# Allegro board SMA_Prototype_C.brd
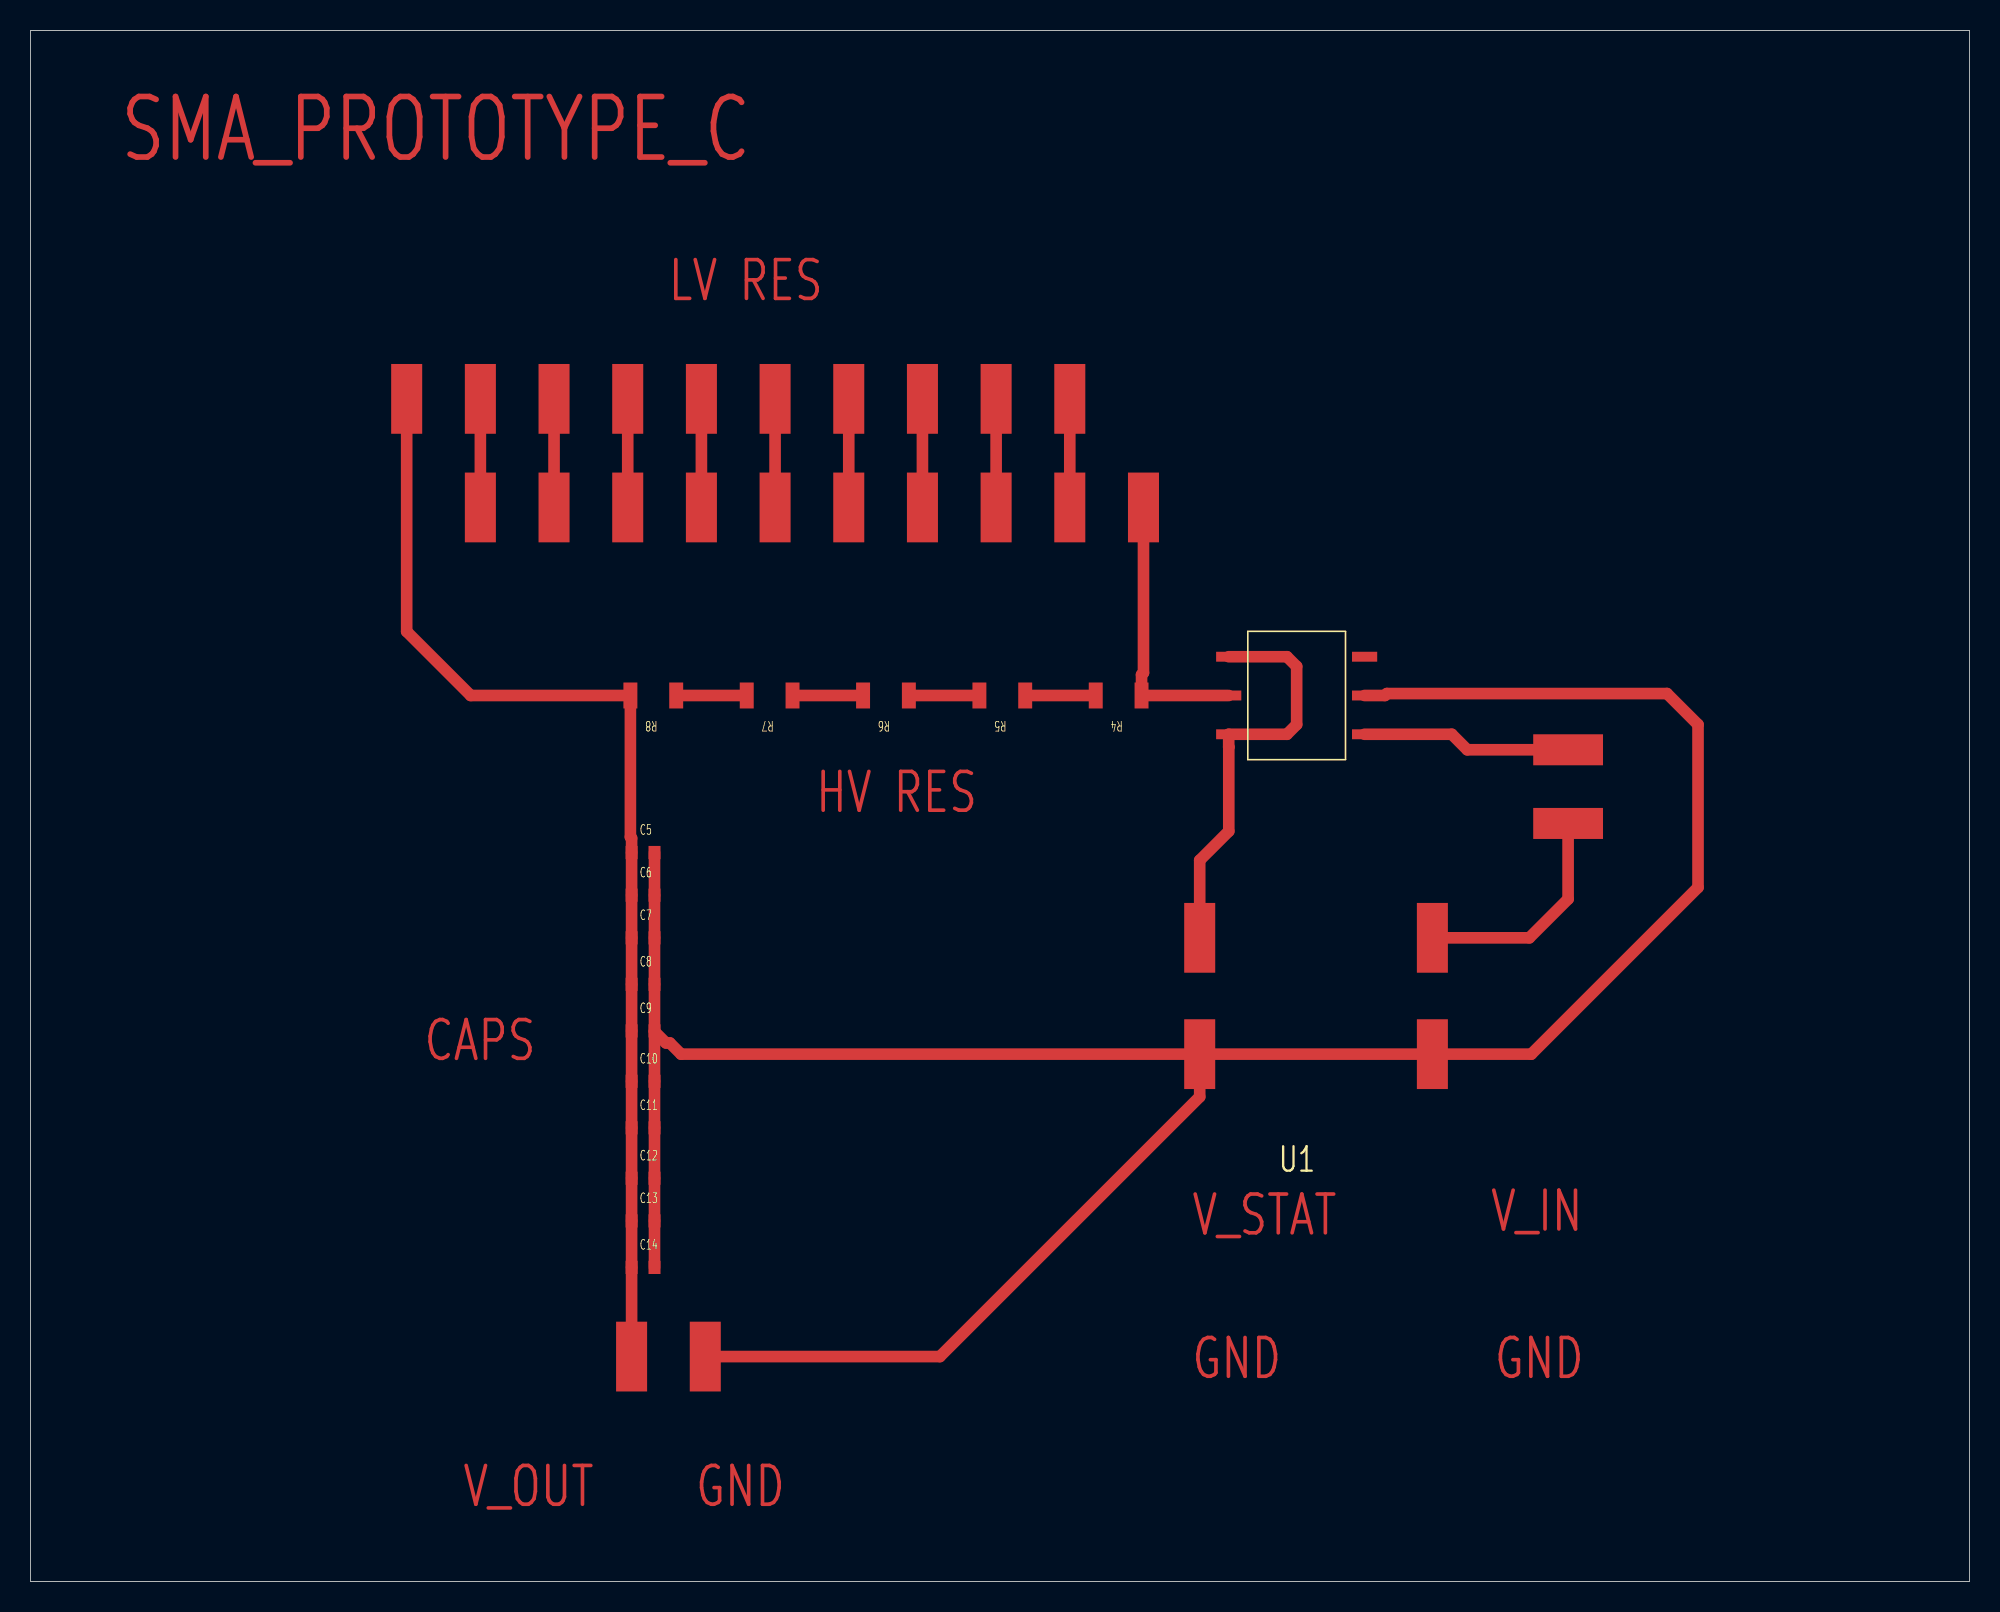
[diagram p0: board, top side]
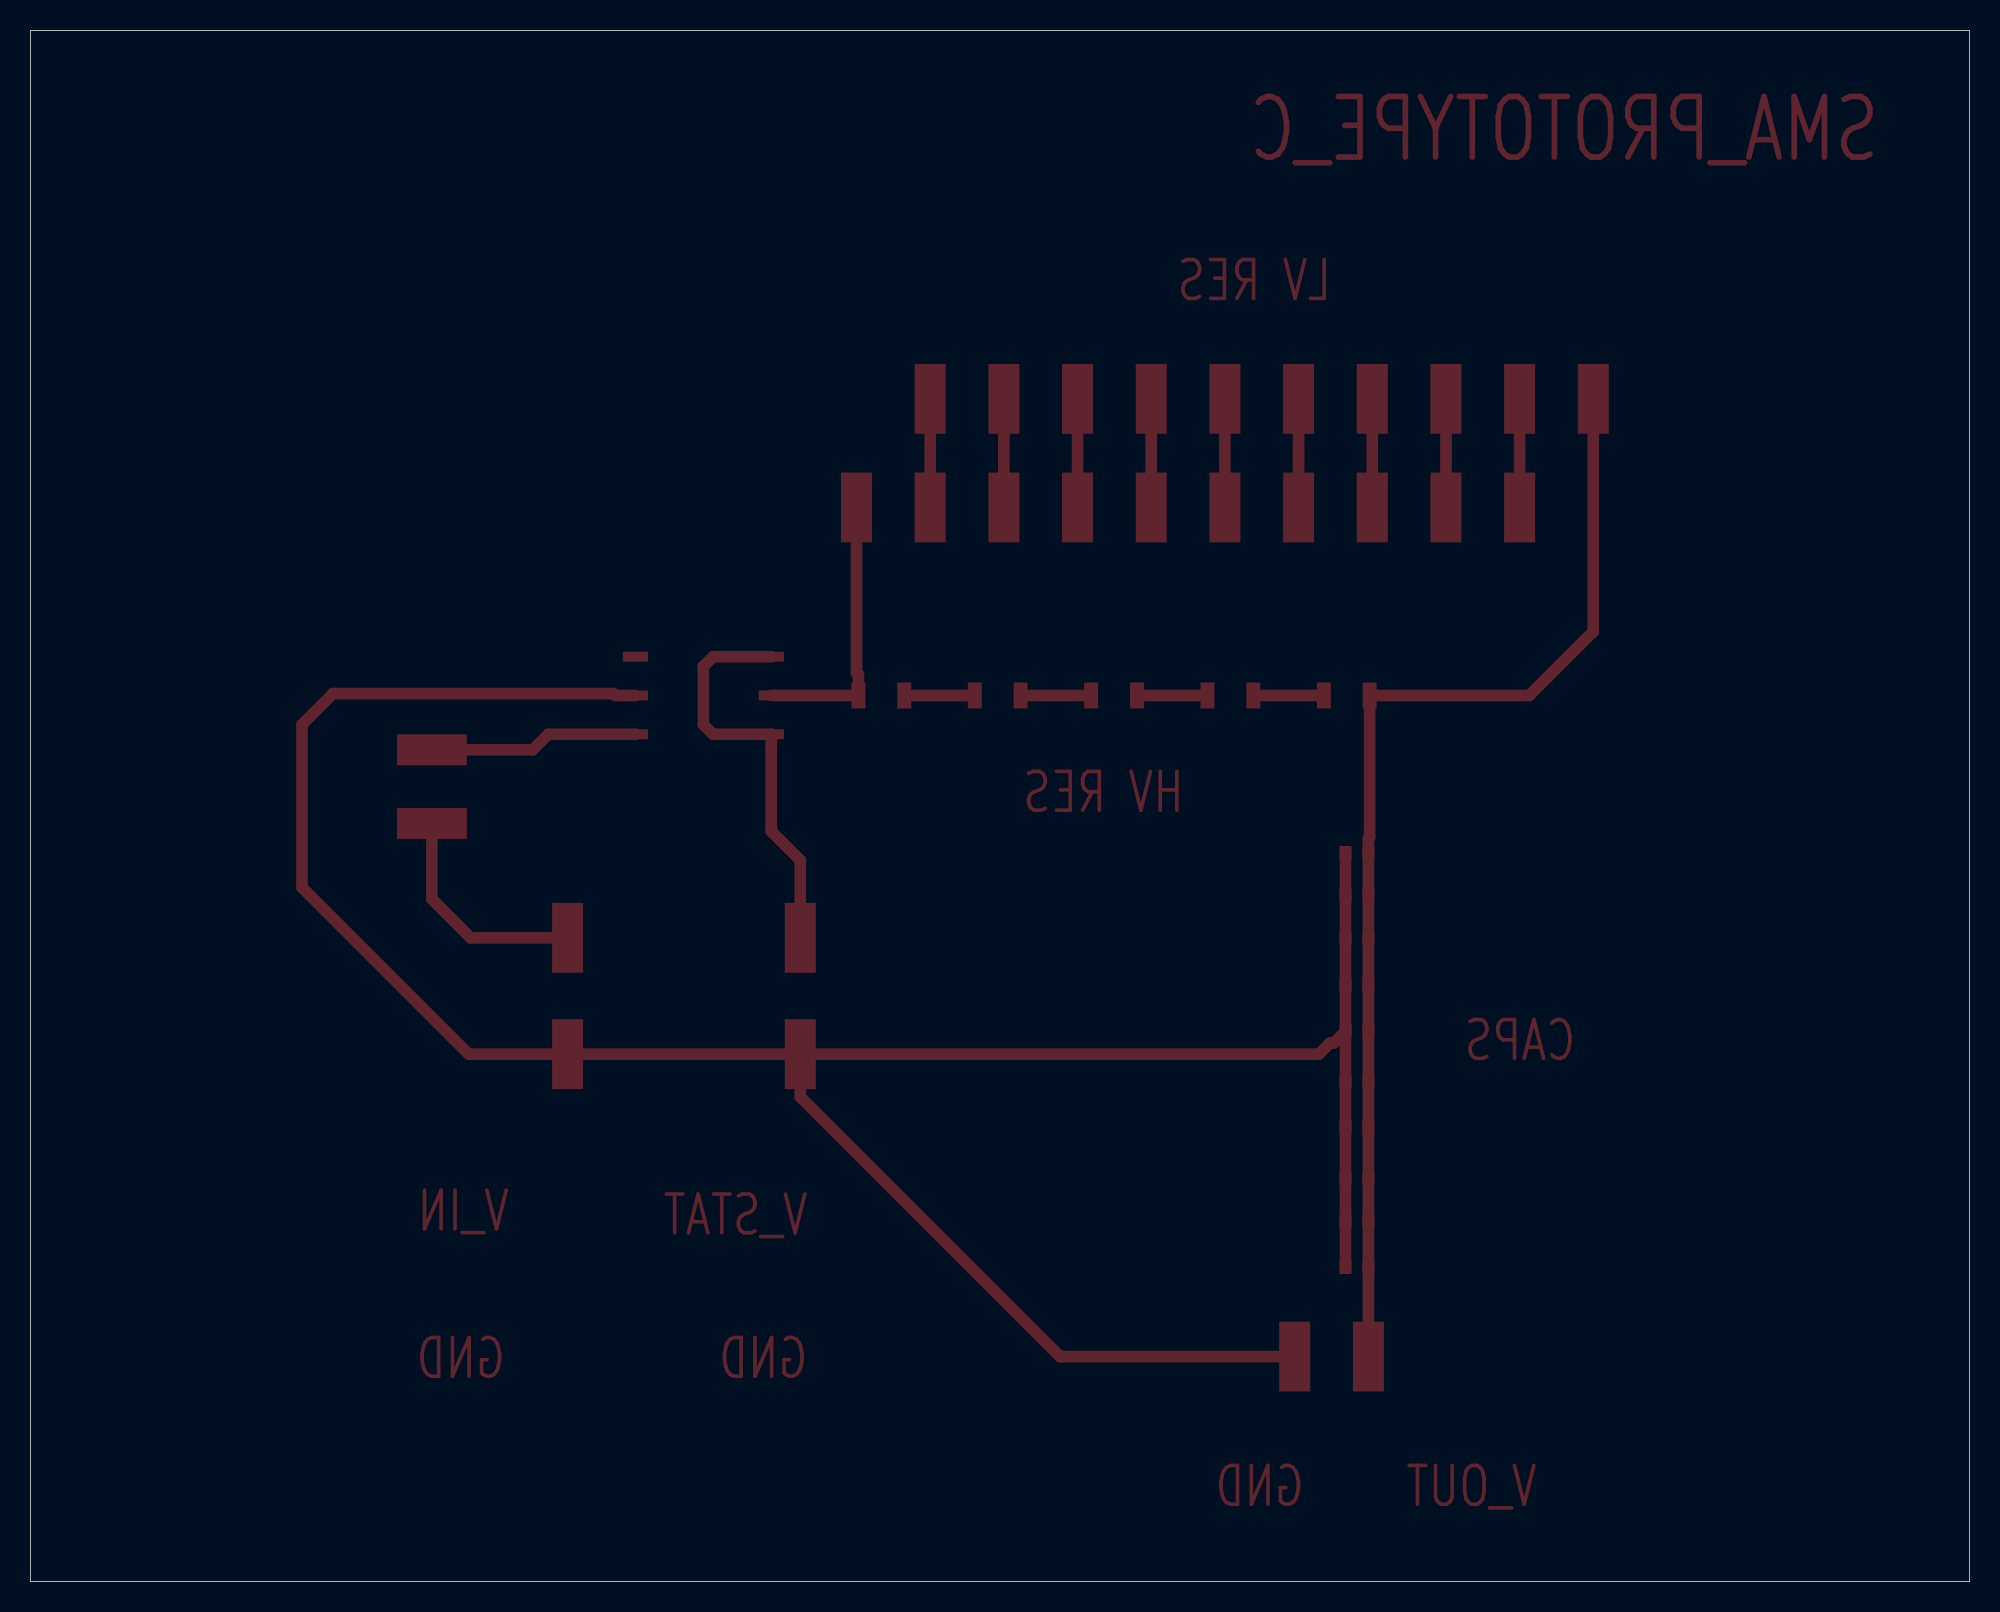
[diagram p1: board, bottom side, seen from below]

Outline 127 x 101.6 mm; copper layers: TOP, BOTTOM. Coordinates in mm from the lower left corner of the outline.
Outline path: 0,101.6 0,0 127,0 127,101.6 0,101.6

## Design rules (mm)
constraint set DEFAULT: min track width 0.127

## Placement (name value [footprint] x y rotation side)
C5  CAP  [S_0603]  39.37 47.75 0 top
C6  CAP  [S_0603]  39.37 44.96 0 top
C7  CAP  [S_0603]  39.37 42.16 0 top
C8  CAP  [S_0603]  39.37 39.12 0 top
C9  CAP  [S_0603]  39.37 36.07 0 top
C10  CAP  [S_0603]  39.37 32.77 0 top
C11  CAP  [S_0603]  39.37 29.72 0 top
C12  CAP  [S_0603]  39.37 26.42 0 top
C13  CAP  [S_0603]  39.37 23.62 0 top
C14  CAP  [S_0603]  39.37 20.57 0 top
R3  4.7k  [LARGE_R_C]  100.71 50.42 90 top
R4  1M  [S_1206]  72.77 58.04 180 top
R5  1M  [S_1206]  65.15 58.04 180 top
R6  1M  [S_1206]  57.53 58.04 180 top
R7  1M  [S_1206]  49.91 58.04 180 top
R8  1M  [S_1206]  42.29 58.04 180 top
R9  1M  [LARGE_R_C]  72.14 70.36 180 top
R10  1M  [LARGE_R_C]  67.31 77.47 180 top
R11  1M  [LARGE_R_C]  62.48 70.36 180 top
R12  1M  [LARGE_R_C]  57.66 77.47 180 top
R13  1M  [LARGE_R_C]  52.83 70.36 180 top
R14  1M  [LARGE_R_C]  48.01 77.47 180 top
R15  1M  [LARGE_R_C]  43.18 70.36 180 top
R16  1M  [LARGE_R_C]  38.35 77.47 180 top
R17  1M  [LARGE_R_C]  33.53 70.36 180 top
R18  1M  [LARGE_R_C]  28.7 77.47 180 top
R19  1M  [LARGE_R_C]  43.43 14.73 180 top
U1  -  [B00JVJDEZE]  76.58 39.62 0 top
U2  -  [PLA170]  82.93 58.04 180 top

## Library data of the parts
C5-C14 = CAP
R3-R19 = RESISTOR
U1 = B00JVJDEZE
U2 = PLA170_0

## Footprints (pads in the part's own frame, mm; a bottom-side part is the same pattern mirrored in y, then rotated)
B00JVJDEZE
  rect 2.032x4.572 smd: 1(15.24,2.54) 2(0,-5.08) 3(0,2.54) 4(15.24,-5.08)
LARGE_R_C
  rect 2.032x4.572 smd: 1(-0.762,0) 2(4.064,0)
PLA170
  rect 1.65x0.65 smd: 1(-4.45,2.54) 2(-4.45,0) 3(-4.45,-2.54) 4(4.45,-2.54) 5(4.45,0) 6(4.45,2.54)
S_0603
  rect 0.787x0.864 smd: 1(0,0) 2(1.5,0)
S_1206
  rect 0.914x1.702 smd: 1(0,0) 2(3,0)

## Nets
GND: C5.2 C6.2 C7.2 C8.2 C9.2 C10.2 C11.2 C12.2 C13.2 C14.2 R19.1 U1.2 U1.4(VOUT-) U2.2
V_IN: R3.1 U1.1
V_STAT: U1.3 U2.4(NC2) U2.6
N02150: R3.2 U2.1
N03798: R4.1 R9.1 U2.5
N04863: C5.1 C6.1 C7.1 C8.1 C9.1 C10.1 C11.1 C12.1 C13.1 C14.1 R8.2 R18.2 R19.2
N04895: R4.2 R5.1
N04899: R5.2 R6.1
N04903: R6.2 R7.1
N04947: R7.2 R8.1
N05024: R9.2 R10.1
N05028: R10.2 R11.1
N05032: R11.2 R12.1
N05036: R12.2 R13.1
N05040: R13.2 R14.1
N05065: R14.2 R15.1
N05069: R15.2 R16.1
N05073: R16.2 R17.1
N05077: R17.2 R18.1

Pads without a net: U2 3

## Routing (per net, layer and track width the routed paths; a pad name or vN(x,y) marks a point on that pad's centre or on a via; arc(x,y) is an arc through that point)
GND: length 176.3
  TOP w0.762: U1.2 42.61,34.54 41.88,35.28 41.62,35.28 40.87,36.03 ; U1.2 U1.4 98.3,34.54 109.22,45.47 109.22,56.13 107.19,58.17 88.84,58.17 88.71,58.04 U2.2 ; U1.2 76.58,31.75 59.56,14.73 R19.1 ; C14.2 C13.2 C12.2 C11.2 C10.2 40.87,36.03 ; C5.2 C6.2 C7.2 C8.2 C9.2 40.87,36.03
V_IN: length 14.9
  TOP w0.762: U1.1 98.17,42.16 100.71,44.7 R3.1
V_STAT: length 27.4
  TOP w0.762: U1.3 76.58,47.24 78.49,49.15 78.49,54.66 78.48,54.67 U2.6 82.3,55.5 82.93,56.13 82.93,59.94 82.3,60.58 U2.4
N02150: length 13.8
  TOP w0.762: R3.2 94.11,54.48 93.09,55.5 U2.1
N03798: length 18.1
  TOP w0.762: R9.1 72.9,59.53 72.77,59.4 R4.1 U2.5
N04863: length 75
  TOP w0.762: R19.2 C14.1 C13.1 C12.1 C11.1 C10.1 C9.1 C8.1 C7.1 C6.1 C5.1 39.37,48.69 39.29,48.77 R8.2 28.83,58.04 24.64,62.23 R18.2
N04895: length 4.6
  TOP w0.762: R4.2 R5.1
N04899: length 4.6
  TOP w0.762: R5.2 R6.1
N04903: length 4.6
  TOP w0.762: R6.2 R7.1
N04947: length 4.6
  TOP w0.762: R7.2 R8.1
N05024: length 7.1
  TOP w0.762: R10.1 R9.2
N05028: length 7.1
  TOP w0.762: R10.2 R11.1
N05032: length 7.1
  TOP w0.762: R12.1 R11.2
N05036: length 7.1
  TOP w0.762: R12.2 R13.1
N05040: length 7.1
  TOP w0.762: R14.1 R13.2
N05065: length 7.1
  TOP w0.762: R14.2 R15.1
N05069: length 7.1
  TOP w0.762: R16.1 R15.2
N05073: length 7.1
  TOP w0.762: R16.2 R17.1
N05077: length 7.1
  TOP w0.762: R18.1 R17.2

## Text on the board
TOP: CAPS | V_OUT | LV RES | GND | HV RES | V_STAT | V_IN | SMA_PROTOTYPE_C
